# EAGLE board Dual Motor Driver (EAGLE 6.5.0)
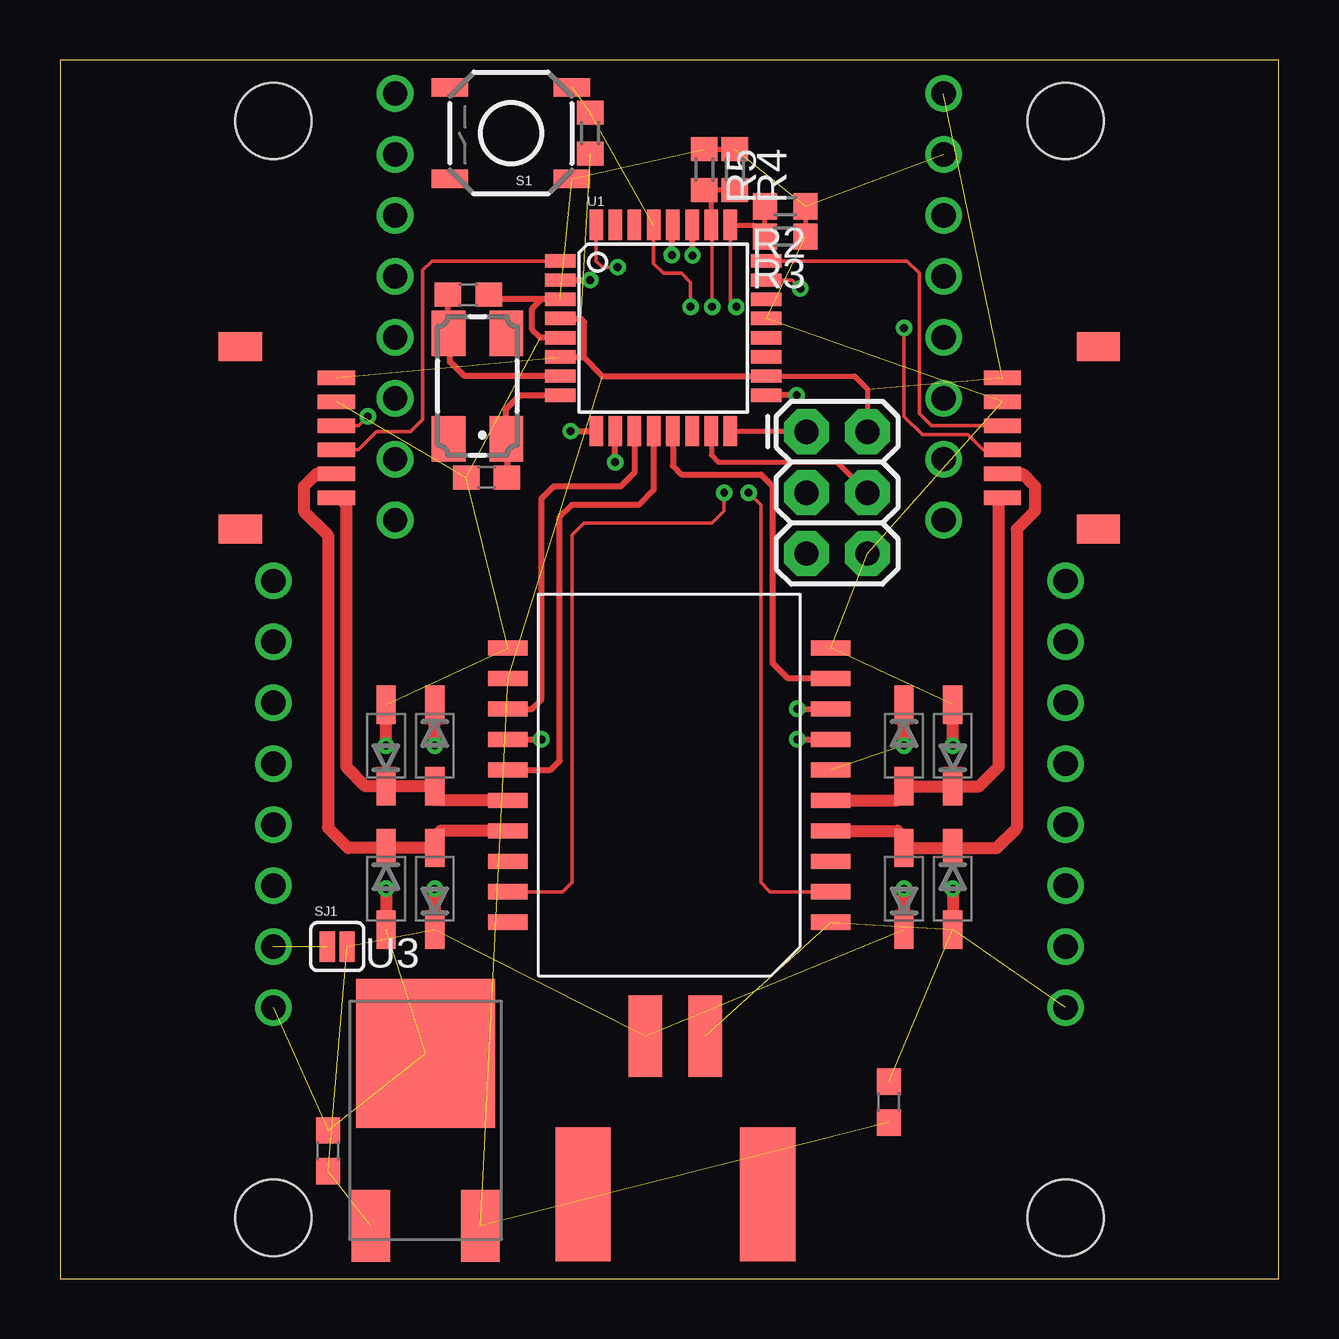
[diagram p0: board, top side]
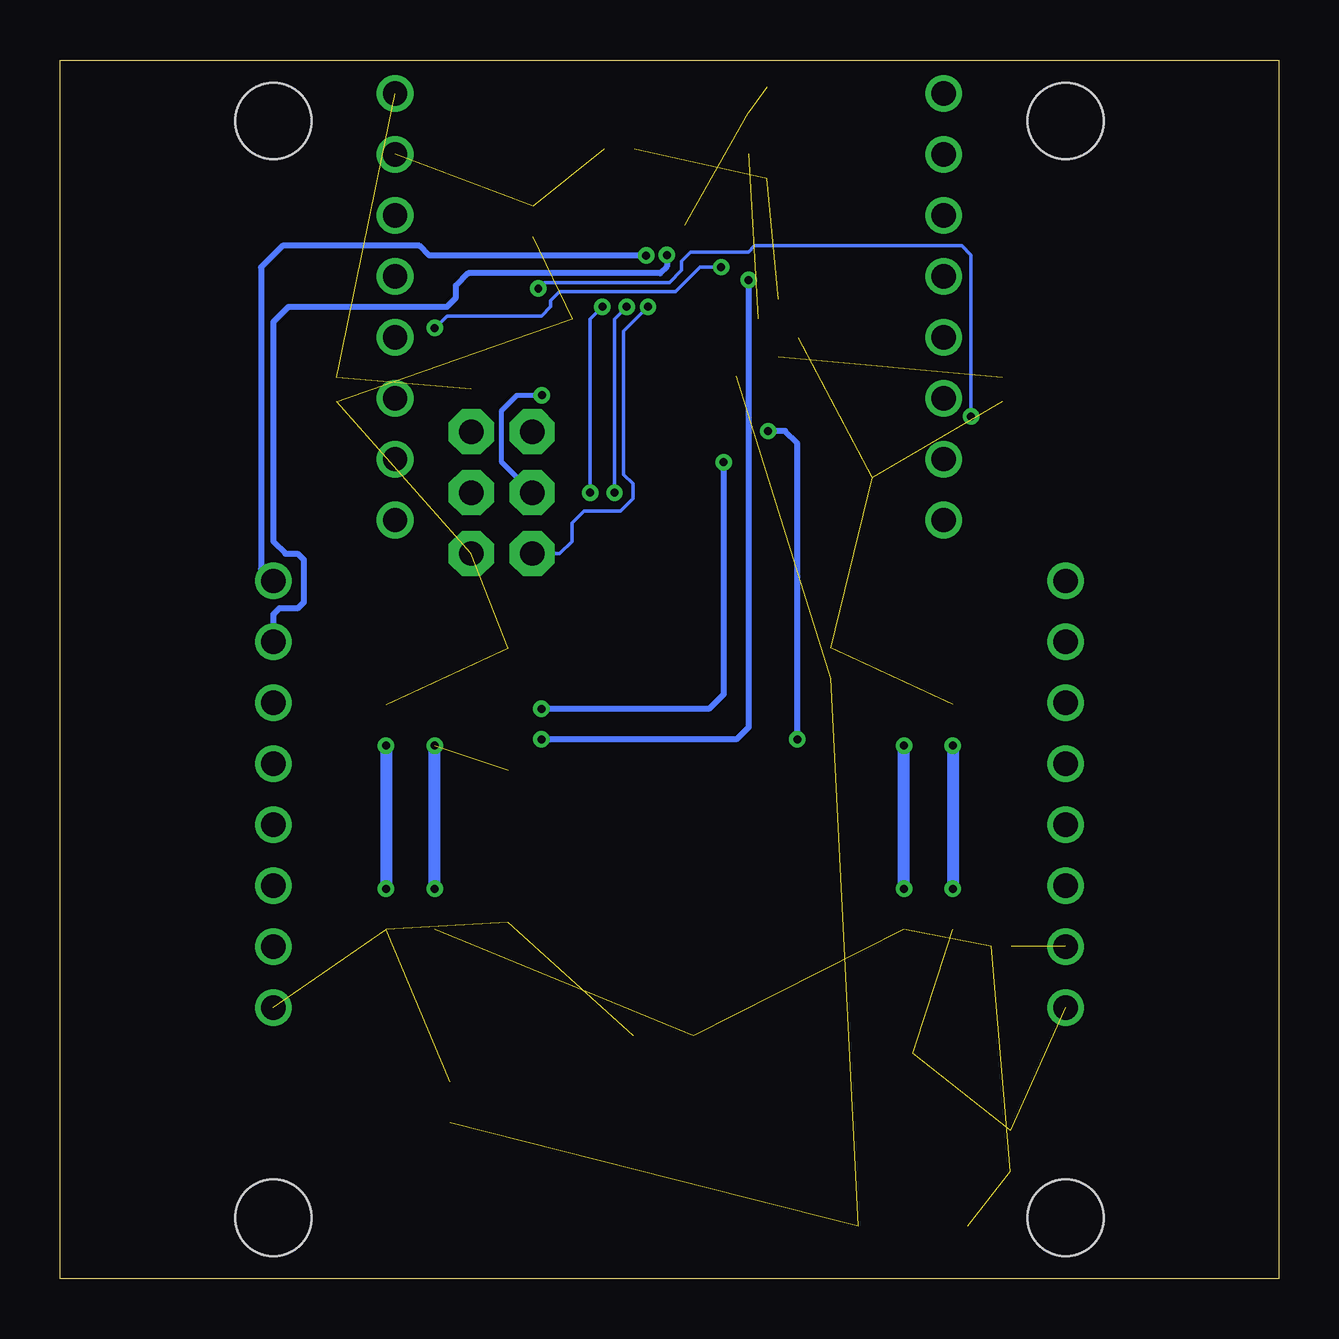
[diagram p1: board, bottom side, seen from below]

Size 50.8 x 50.8 mm. Coordinates in mm from the lower left corner, seen from the top.
Outline: 0,0 50.8,0 50.8,50.8 0,50.8 0,0
Copper layers (1*16): Top 0.0356mm / dielectric 1.5011mm / Bottom 0.0356mm
Design rules "LaenPCBOrder": minimum track width 6mil, minimum drill 13mil, track to track 6mil, track to pad 6mil, pad to pad 6mil, via to via 6mil, smd to smd 6mil, copper to edge 15mil, drill to drill 6mil, minimum pad ring 7mil, minimum via ring 7mil, stop-mask expansion 4mil, vias tented up to drill 0mil, thermal gap 10mil
Holes 3.17 mm at 8.89,2.54 41.91,2.54 41.91,48.26 8.89,48.26

## Footprints (pad centres in the part's own frame; a part is rotated, then mirrored left to right if it is on the bottom)
C0603 = smd 1.1 x 1: 1 -0.85,0; 2 0.85,0
SOD123 = smd 1.6 x 0.8: 1 -1.7,0; 2 1.7,0
2X3 = drill 1.016 pad 1.88 octagon: 1 0,0; 2 0,2.54; 3 2.54,0; 4 2.54,2.54; 5 5.08,0; 6 5.08,2.54
1X08_NO_SS = drill 1.016: 1 -8.89,0; 2 -6.35,0; 3 -3.81,0; 4 -1.27,0; 5 1.27,0; 6 3.81,0; 7 6.35,0; 8 8.89,0
6PIN-SH_SERIES_RA = smd 0.6 x 1.55: P$1 -2.5,2.125; P$2 -1.5,2.125; P$3 -0.5,2.125; P$4 0.5,2.125; P$5 1.5,2.125; P$6 2.5,2.125 | smd 1.2 x 1.8: P$7 3.8,-1.875; P$8 -3.8,-1.875
2-POS_SMD_TERMINAL_BLOCK = smd 2.3 x 5.6: P$1 -3.85,-2.325; P$2 3.85,-2.325 | smd 1.4 x 3.4: P$3 -1.25,4.275; P$4 1.25,4.275
CTS406 = smd 1.9 x 1.4: 1 -2.2,-1.2; 2 2.2,-1.2; 3 2.2,1.2; 4 -2.2,1.2
R0603 = smd 1 x 1.1: 1 -0.85,0; 2 0.85,0
TACTILE_SWITCH_SMD = smd 1.524 x 0.762: 1 -2.54,1.905; 2 2.54,1.905; 3 -2.54,-1.905; 4 2.54,-1.905
SJ_2S = smd 0.635 x 1.27: 1 -0.412,0; 2 0.412,0
TQFP32-08 = smd 1.27 x 0.559: 1 -4.293,2.8; 2 -4.293,2; 3 -4.293,1.2; 4 -4.293,0.4; 5 -4.293,-0.4; 6 -4.293,-1.2; 7 -4.293,-2; 8 -4.293,-2.8; 17 4.293,-2.8; 18 4.293,-2; 19 4.293,-1.2; 20 4.293,-0.4; 21 4.293,0.4; 22 4.293,1.2; 23 4.293,2; 24 4.293,2.8 | smd 0.559 x 1.27: 9 -2.8,-4.293; 10 -2,-4.293; 11 -1.2,-4.293; 12 -0.4,-4.293; 13 0.4,-4.293; 14 1.2,-4.293; 15 2,-4.293; 16 2.8,-4.293; 25 2.8,4.293; 26 2,4.293; 27 1.2,4.293; 28 0.4,4.293; 29 -0.4,4.293; 30 -1.2,4.293; 31 -2,4.293; 32 -2.8,4.293
POWERSO20 = smd 1.651 x 0.635: 1 -6.731,5.715; 2 -6.731,4.445; 3 -6.731,3.175; 4 -6.731,1.905; 5 -6.731,0.635; 6 -6.731,-0.635; 7 -6.731,-1.905; 8 -6.731,-3.175; 9 -6.731,-4.445; 10 -6.731,-5.715; 11 6.731,-5.715; 12 6.731,-4.445; 13 6.731,-3.175; 14 6.731,-1.905; 15 6.731,-0.635; 16 6.731,0.635; 17 6.731,1.905; 18 6.731,3.175; 19 6.731,4.445; 20 6.731,5.715
TO263 = smd 5.791 x 6.198: P$1 0,2.794 | smd 1.6 x 2.997: P$2 -2.286,-4.394; P$3 2.286,-4.394

## Placement (x,y rotation side)
C2  22pF  [C0603]  17.78,33.4 0 top
C6  4.7uF  [C0603]  34.54,7.37 90 top
C7  0.1uF  [C0603]  11.18,5.33 90 top
C8  22pF  [C0603]  17.02,41.02 180 top
D1  [SOD123]  37.21,16.26 270 top
D2  [SOD123]  37.21,22.23 90 top
D3  [SOD123]  13.59,22.23 90 top
D4  [SOD123]  13.59,16.26 270 top
D5  [SOD123]  15.62,16.26 90 top
D6  [SOD123]  15.62,22.23 270 top
D7  [SOD123]  35.18,22.23 270 top
D8  [SOD123]  35.18,16.26 90 top
J1  AVR_SPI_PRG_6PTH  [2X3]  31.11,35.31 270 top
JP1  [1X08_NO_SS]  13.97,40.51 90 top
JP2  [1X08_NO_SS]  8.89,20.19 90 top
JP3  [1X08_NO_SS]  41.91,20.19 90 top
JP4  [1X08_NO_SS]  36.83,40.51 270 top
JP5  6PIN-SH_RIGHT_ANGLE  [6PIN-SH_SERIES_RA]  9.4,35.05 270 top
JP6  6PIN-SH_RIGHT_ANGLE  [6PIN-SH_SERIES_RA]  41.4,35.05 90 top
JP7  2-POS_SMD_TERM_BLOCK  [2-POS_SMD_TERMINAL_BLOCK]  25.65,5.84 0 top
Q1  16MHz  [CTS406]  17.4,37.21 90 top
R1  10K  [R0603]  22.1,47.75 270 top
R2  1  [R0603]  30.23,44.7 180 top
R3  1  [R0603]  30.23,43.43 180 top
R4  1  [R0603]  28.13,46.23 270 top
R5  1  [R0603]  26.86,46.23 270 top
S1  SWITCH-MOMENTARY-2SMD  [TACTILE_SWITCH_SMD]  18.8,47.75 180 top
SJ1  SOLDERJUMPERNC  [SJ_2S]  11.56,13.84 0 top
U1  ATMEGA328P  [TQFP32-08]  25.15,39.62 0 top
U2  L298_BRIDGE_DRIVER  [POWERSO20]  25.4,20.57 180 top
U3  LM2931  [TO263]  15.24,6.6 0 top

## Library data of the parts
C2 C6-C8 R1-R5 = resistor
D1-D8 = semicon-smd-ipc; PART#: CDBW140-G
J1 = SparkFun-Connectors
JP1-JP4 = pinhead
JP5 JP6 = con-jst; PART#: SM06B-SRSS-TB(LF)(SN)
JP7 = My Parts
Q1 = crystal; OC_FARNELL: unknown; OC_NEWARK: unknown; PART#: 406C35D16M00000
S1 = SparkFun-Electromechanical
SJ1 = SparkFun-Passives
U1 = SparkFun-DigitalIC; PROD_ID: IC-09069
U2 = SparkFun-PowerIC
U3 = on-semiconductor

## Nets
+5V: C6.1 J1.2 JP4.1 JP5.P$1 JP6.P$6 R1.2 U1.4 U1.6 U1.18 U2.12 U3.P$3
+24V: C7.1 D5.1 D6.1 D7.1 D8.1 JP7.P$3 SJ1.2 U2.6 U3.P$2
ENC1A: JP6.P$3 U1.32
ENC1B: JP6.P$4 U1.24
ENC2A: JP5.P$3 U1.23
ENC2B: JP5.P$4 U1.1
GND: C2.1 C6.2 C7.2 C8.1 D1.2 D2.2 D3.2 D4.2 J1.6 JP2.1 JP3.1 JP4.2 JP5.P$2 JP6.P$5 JP7.P$4 R2.1 R3.1 R4.1 R5.1 S1.1 U1.3 U1.5 U1.21 U2.1 U2.10 U2.11 U3.P$1
M1+: U1.2 U2.7
M1-: U1.13 U2.9
M1A: D1.1 D8.2 JP6.P$2 U2.4
M1B: D2.1 D7.2 JP6.P$1 U2.5
M2+: U1.11 U2.13
M2-: U1.12 U2.15
M2A: D3.1 D6.2 JP5.P$6 U2.16
M2B: D4.1 D5.2 JP5.P$5 U2.17
MISO: J1.1 U1.16
MOSI: J1.4 U1.15
N$5: JP2.2 SJ1.1
N$6: C8.2 Q1.3 U1.7
N$7: C2.2 Q1.1 U1.8
PWM1: U1.10 U2.8
PWM2: U1.9 U2.14
RESET: J1.5 R1.1 S1.3 U1.29
SCK: J1.3 U1.17
SCL: JP3.7 U1.28
SDA: JP3.8 U1.27
SENSE_1: R2.2 R3.2 U1.25 U2.2
SENSE_2: R4.2 R5.2 U1.26 U2.19

## Tracks (layer width: path | path; a pad name or v marks a point on that pad's centre or on a via)
+5V  (7 unrouted)
  Top 0.203: U1.18 33.12,37.62 33.66,37.08 J1.2
  Top 0.254: U1.6 21.85,38.42 | 21.85,38.42 22.61,37.62 U1.18 | U1.4 21.7,40.02 21.85,39.87 21.85,38.42
+24V  (via drill 0.33)  (6 unrouted)
  Top 0.508: v15.62,22.23 D6.1 | v15.62,16.26 D5.1 | v35.18,16.26 D8.1 | v35.18,22.23 D7.1
  Bottom 0.508: v15.62,16.26 v15.62,22.23 | v35.18,16.26 v35.18,22.23
ENC1A  (via drill 0.33)
  Top 0.152: JP6.P$3 38.47,34.55 37.85,35.18 35.94,35.18 35.18,35.94 v35.18,39.62 | U1.32 22.35,42.42 22.61,42.16 v23.24,42.16
  Bottom 0.152: v35.18,39.62 34.67,40.13 30.73,40.13 30.35,40.51 30.35,40.77 29.97,41.15 25.15,41.15 24.13,42.16 v23.24,42.16
ENC1B
  Top 0.152: JP6.P$4 36.33,35.55 35.81,36.07 35.81,41.91 35.31,42.42 U1.24
ENC2A  (via drill 0.33)
  Top 0.152: U1.23 30.51,41.62 v30.86,41.27 | JP5.P$3 12.44,35.55 v12.83,35.94
  Bottom 0.152: v30.86,41.27 30.61,41.53 25.4,41.53 24.89,42.04 24.89,42.42 24.51,42.8 22.1,42.8 21.84,43.05 13.21,43.05 12.83,42.67 v12.83,35.94
ENC2B
  Top 0.152: U1.1 15.5,42.42 15.11,42.04 15.11,35.81 14.61,35.31 13.21,35.31 12.45,34.55 JP5.P$4
GND  (via drill 0.33)  (20 unrouted)
  Top 0.203: R5.1 R4.1 | R2.1 R3.1
  Top 0.254: U1.3 20.07,40.82 | 20.07,40.82 18.07,40.82 C8.1 | U1.5 20.02,39.22 19.68,39.56 19.68,40.44 20.07,40.82
  Top 0.508: v13.59,16.26 D4.2 | v13.59,22.23 D3.2 | v37.21,16.26 D1.2 | v37.21,22.23 D2.2
  Bottom 0.508: v13.59,22.23 v13.59,16.26 | v37.21,22.23 v37.21,16.26
M1+  (via drill 0.33)
  Top 0.254: U1.2 v22.09,41.62 v22.1,41.63 | v30.73,22.48 U2.7
  Bottom 0.254: v22.1,41.63 22.1,22.99 22.61,22.48 v30.73,22.48
M1-
  Top 0.254: U2.9 30.35,25.02 29.72,25.65 29.72,33.02 29.34,33.4 29.21,33.53 25.91,33.53 25.55,33.89 U1.13
M1A
  Top 0.508: U2.4 34.92,18.67 35.05,18.54 35.05,18.08 D8.2 D1.1 39.04,17.96 39.88,18.8 39.88,31.24 40.64,32 40.64,33.02 40.11,33.55 JP6.P$2
M1B
  Top 0.508: U2.5 34.92,19.94 35.05,20.07 35.05,20.4 D7.2 D2.1 38.3,20.52 39.12,21.34 39.12,32.51 39.16,32.55 JP6.P$1
M2+
  Top 0.254: U2.13 19.68,23.75 20.07,24.13 20.07,32.51 20.57,33.02 23.37,33.02 23.95,33.6 U1.11
M2-
  Top 0.254: U2.15 20.45,21.21 20.83,21.59 20.83,31.75 21.34,32.26 24.13,32.26 24.75,32.87 U1.12
M2A
  Top 0.508: U2.16 15.62,19.94 15.49,20.07 15.49,20.4 D6.2 D3.1 12.75,20.52 11.94,21.34 11.94,32.26 11.64,32.55 JP5.P$6
M2B
  Top 0.508: U2.17 15.88,18.67 15.75,18.54 15.75,18.08 D5.2 D4.1 12.02,17.96 11.18,18.8 11.18,30.99 10.16,32 10.16,33.02 10.69,33.55 JP5.P$5
MISO
  Top 0.203: J1.1 27.97,35.31 U1.16
MOSI
  Top 0.203: U1.15 27.15,34.32 27.43,34.04 32.38,34.04 J1.4
N$5  (1 unrouted)
N$6
  Top 0.254: C8.2 16.17,39.41 Q1.3 16.26,39.35 16.26,38.23 16.86,37.62 U1.7
N$7
  Top 0.254: C2.2 18.63,35.01 Q1.1 18.6,36.25 19.18,36.83 U1.8
PWM1  (via drill 0.33)
  Top 0.254: v23.14,34.04 23.14,35.33 U1.10 | v30.73,23.75 U2.8
  Bottom 0.254: v23.14,34.04 23.14,24.36 23.75,23.75 v30.73,23.75
PWM2  (via drill 0.33)
  Top 0.254: v21.29,35.33 U1.9 | U2.14 v20.07,22.48
  Bottom 0.254: v20.07,22.48 20.07,34.82 20.57,35.33 v21.29,35.33
RESET  (via drill 0.33)  (2 unrouted)
  Top 0.152: v26.29,40.51 26.29,41.53 25.91,41.91 25.15,41.91 24.75,42.31 U1.29
  Bottom 0.152: J1.5 29.97,30.23 29.46,30.73 29.46,31.5 28.96,32 27.43,32 26.92,32.51 26.92,33.15 27.3,33.53 27.3,39.5 v26.29,40.51
SCK  (via drill 0.33)
  Top 0.254: v30.71,36.83 U1.17
  Bottom 0.203: J1.3 32.38,34.04 32.38,36.2 31.75,36.83 v30.71,36.83
SCL  (via drill 0.33)
  Top 0.254: v25.5,42.67 25.5,43.87 U1.28
  Bottom 0.254: v25.5,42.67 25.5,42.19 25.78,41.91 33.78,41.91 34.29,41.4 34.29,40.89 34.67,40.51 41.27,40.51 41.91,39.88 41.91,30.73 41.4,30.23 40.89,30.23 40.64,29.97 40.64,28.19 40.89,27.94 41.66,27.94 41.91,27.69 JP3.7
SDA  (via drill 0.33)
  Top 0.254: v26.36,42.65 26.36,43.9 U1.27
  Bottom 0.254: v26.36,42.65 35.41,42.65 35.81,43.05 41.53,43.05 42.42,42.16 42.42,29.59 JP3.8
SENSE_1  (via drill 0.33)
  Top 0.152: U2.2 29.59,16.13 29.21,16.51 29.21,32.26 v28.7,32.77 | v28.19,40.51 27.94,40.77 U1.25
  Top 0.203: U1.25 28.89,43.92 R3.2 R2.2
  Bottom 0.152: v28.7,32.77 28.7,40.01 v28.19,40.51
SENSE_2  (via drill 0.33)
  Top 0.152: U2.19 20.95,16.13 21.34,16.51 21.34,30.99 21.84,31.5 27.18,31.5 27.69,32 v27.69,32.77 | v27.18,40.51 27.18,43.88 U1.26
  Top 0.203: U1.26 27.15,45.09 R5.2 R4.2
  Bottom 0.152: v27.69,32.77 27.69,40.01 v27.18,40.51